# Altium PCB MD5133-A02-01.PcbDoc
Units mil, origin at the board's own origin, x right, y up, seen from the top; angles counter-clockwise.
Board outline 1207.8 x 889 mil, 2 copper layers (TopLayer, BottomLayer); 38 components, 29 nets, 249 pads, 0 vias.
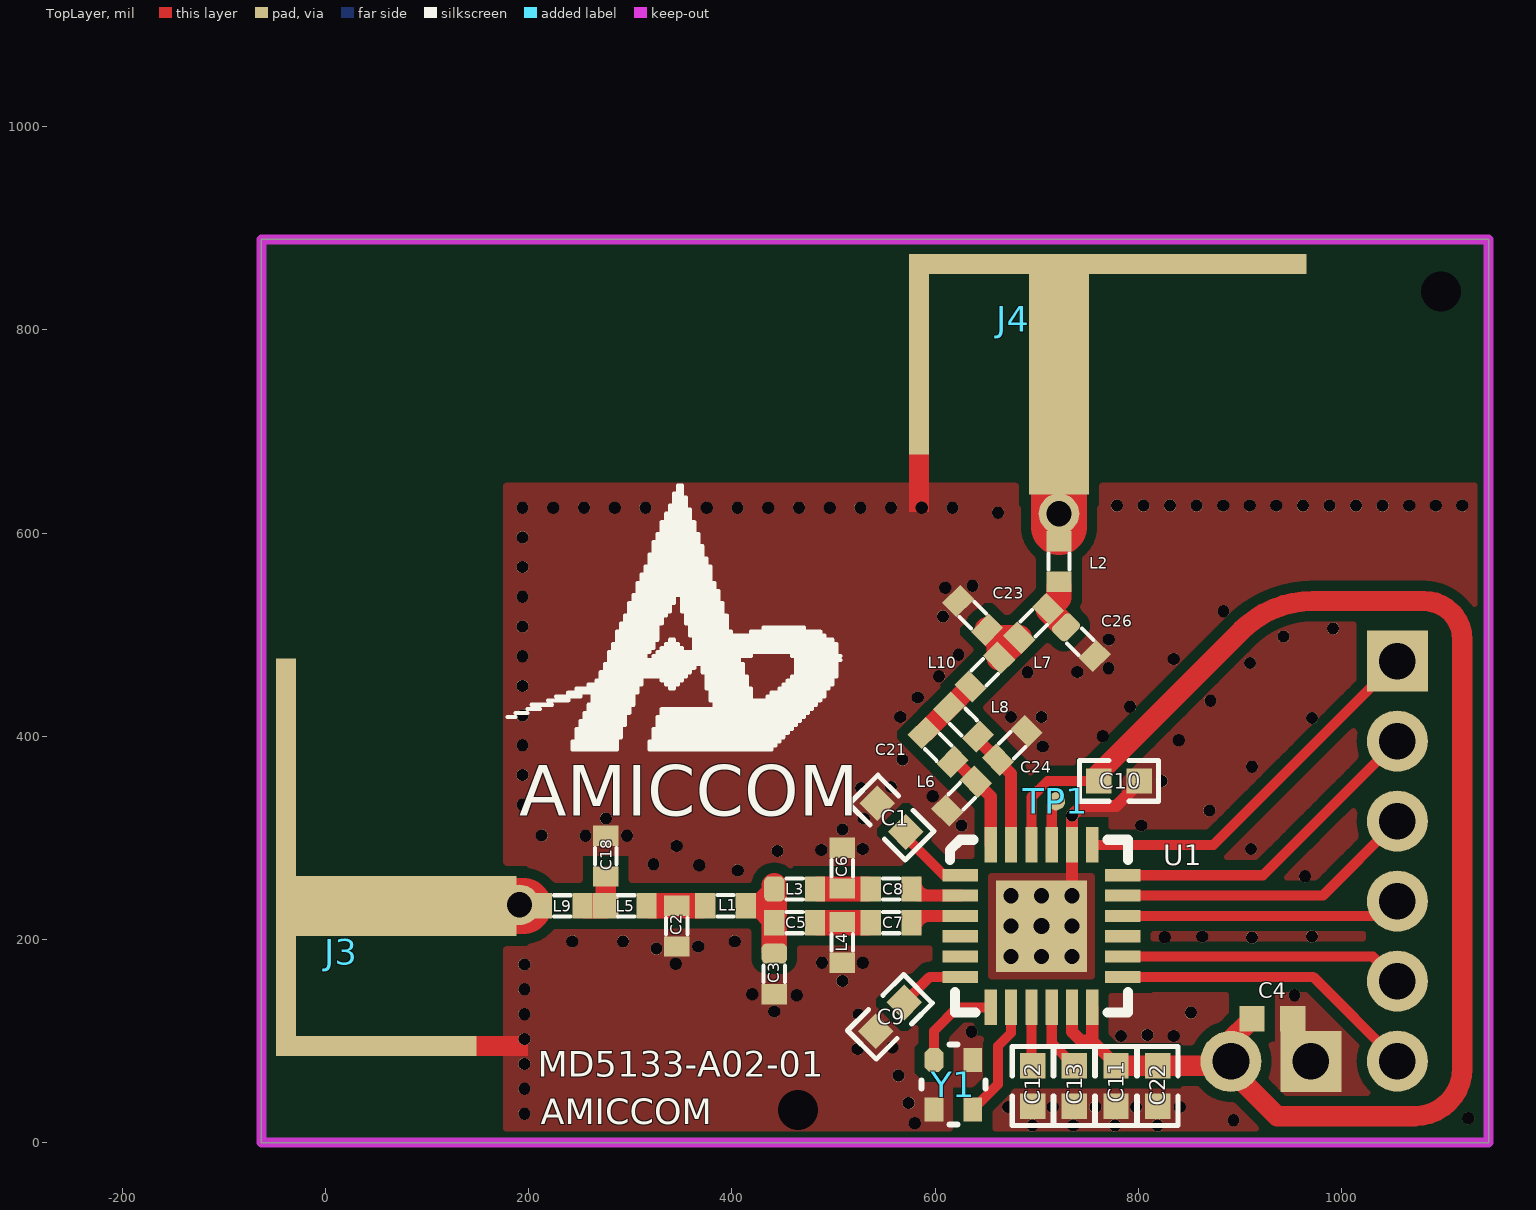
[diagram p0: TopLayer view]
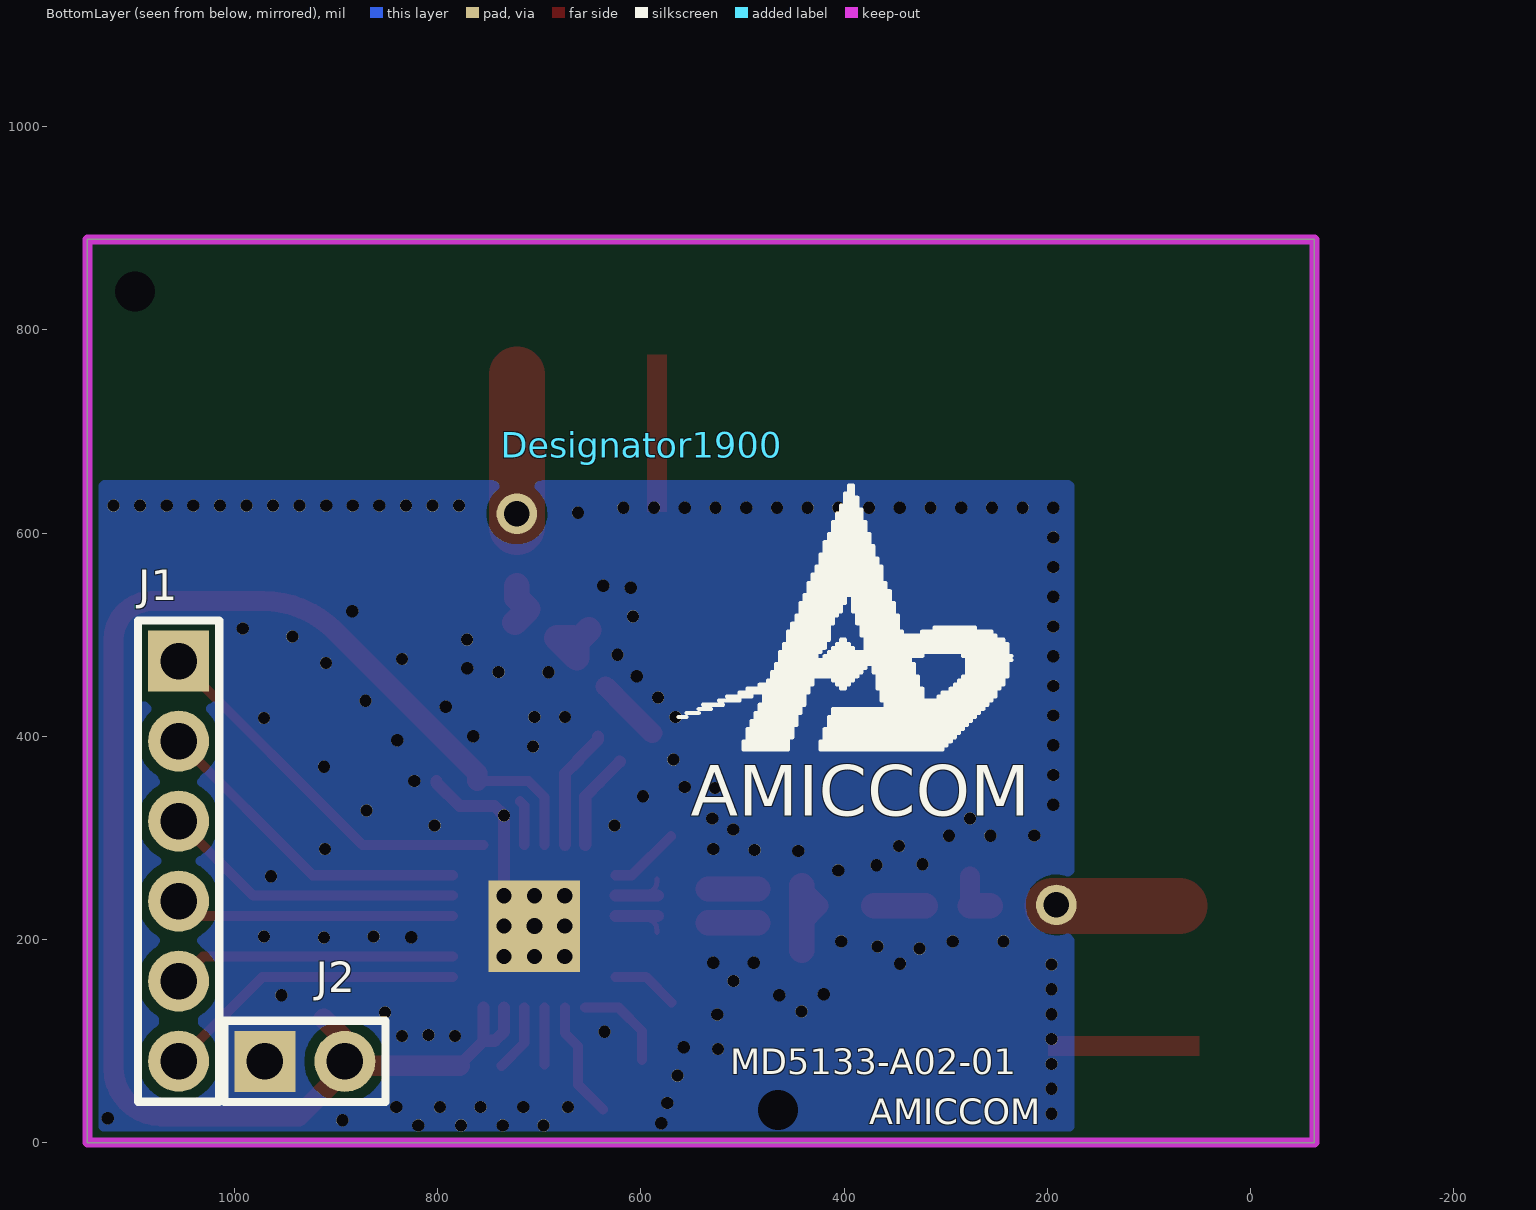
[diagram p1: BottomLayer view, seen from below]

## Layer stack, top to bottom
TopLayer: signal copper 1.4
Dielectric: dielectric 12.6, FR-4, Dk 4.8
BottomLayer: signal copper 1.4

## Board outline
-63,0 -63,889 1144.79,889 1144.79,0

## Design rules (kind name [scope] priority, off if disabled: settings)
Clearance Clearance_1 [(InPoly) vs (IsWire) Or (IsPad) Or (IsVia) Or (IsFill) Or (InPoly)] p1: gap=10
Clearance [All] p2: gap=6
ComponentClearance [All] p1 off: gap=10 collisioncheckmode=3 verticalgap=10 showdistances=FALSE
FabricationTestPointUsage TestPointUsage [All] p1: valid=0 allowmultiple=FALSE
FabricationTestpoint Testpoint [All] p1: side=3 testpointundercomponent=TRUE minsize=40 maxsize=100 preferedsize=60 minholesize=20 maxholesize=40 preferedholesize=32 testpointgrid=1 allowsidetop=TRUE allowsidebottom=TRUE usegrid=TRUE gridtolerance=0.01
HoleSize [All] p1: absolutevalues=TRUE maxlimit=200 minlimit=1 maxpercent=80.000 minpercent=20.000
PolygonConnect [All] p1: connectstyle=Direct reliefconductorwidth=10 reliefentries=4 polygonreliefangle="90 Angle" airgapwidth=10
RoutingVias [All] p1: holewidth=28 width=50 viastyle="Through Hole" minholewidth=28 minwidth=50 maxholewidth=28 maxwidth=50
SilkscreenOverComponentPads [IsPad] p1: minsilkscreentomaskgap=10
SolderMaskExpansion [All] p1: expansion=4
Width [All] p1: maxlimit=100 minlimit=6 preferedwidth=10
23 further rules are at their usual default settings.

## Classes and differential pairs
component class MD5133-A02-01: C1 C2 C3 C4 C5 C6 C7 C8 C9 C10 C11 C12 C13 C18 C21 C22 C23 C24 C26 J1 J2 J3 J4 L1 L2 L3 L4 L5 L6 L7 L8 L9 L10 TP1 U1 Y1

## Components (designator, comment, footprint, x,y, rotation, side; value= is the part's Value field where it differs from the comment)
C1 "0.22uF" 0402 543,334.13 r315 top
C2 "0.2pF" 0402-3#1 345.79,213.13 r270 top
C3 "NC" 0402-3#2 441.79,166.13 r270 top
C4 "2.2uF" 0402 952,122.13 r180 top
C5 "0.5pF" 0402-3#1 461.79,216.63 r180 top
C6 "0.5pF" 0402-3#1 508.79,270.13 r90 top
C7 "5.6pF" 0402-3#1 556.79,216.63 r0 top
C8 "5.6pF" 0402-3#1 556.79,249.63 r0 top
C9 "0.22uF" 0402 569.79,138 r225 top
C10 "0.1uF" 0402 761,356 r0 top
C11 "2.2uF" 0402 778.14,35.73 r90 top
C12 "10nF" 0402 696,35.73 r90 top
C13 "0.22uF" 0402 737.07,35.73 r90 top
C18 "0.1pF" 0402-3#1 276,282 r90 top
C21 "0.4pF" 0402-3#1 603,389 r135 top
C22 "2.2uF" 0402 819.21,35.73 r90 top
C23 "0.1pF" 0402-3#1 637,519 r315 top
C24 "0.4pF" 0402-3#1 676,391 r225 top
C26 "NC" 0402-3#3 743,493 r135 top
Designator1900 "Comment" BMP1 599,687 r180 bottom
J1 "CON/6P 2.0" HDR6_2.0 1055,474 r270 bottom
J2 "CON/2P 2.0" HDR2_2.0 970,80 r180 bottom (schematic designator J4)
J3 "Tx_ANTENNA" ANT3_5.8G-A1011 70,233 r0 top
J4 "Rx_ANTENNA" ANT3_5.8G-A1011 722,756 r270 top (schematic designator J2)
L1 "0R" 0402-3#1 393.79,233.13 r0 top
L2 "0R" 0402-3#1 722,572 r90 top
L3 "1.6nH" 0402-3#2 461.79,249.63 r0 top
L4 "1.6nH" 0402-3#1 508.79,197.13 r270 top
L5 "1nH" 0402-3#4 296,233 r180 top
L6 "0.6nH" 0402-3#1 626.21,341.13 r45 top
L7 "0.6nH" 0402-3#1 697,511.13 r45 top
L8 "0.6nH" 0402-3#1 628,414 r135 top
L9 "0R" 0402-3#1 233,233 r180 top
L10 "0R" 0402-3#1 649,463.13 r45 top
TP1 "TP" "PAD - SMD" 719,336 r90 top
U1 "A5133_U02_Q4P24" "QFN 4*4 24L_A7190" 704.79,213.13 r0 top
Y1 "16MHz, CL=9pF" "XTAL_2.0 *1.6" 618,57 r270 top
? "" BMP1 143,687 r0 top

## Footprints (in the part's own frame and the unit in brackets; to place one, negate y for a bottom-side part, rotate by r counter-clockwise, add the part's x,y. Pads: shape width x height; smd on the part's side, far side on the other; paste and mask are expansions set on the pad)
0402 [mil]
  rect 25x25 smd: 1(0,0) 2(40,0)
  silkscreen extent -19,-20 59,20
0402-3#1 [mil]
  rect 20x25 smd: 1(-20,0) 2(20,0)
  silkscreen extent -8,-11 8,11
0402-3#2 [mil]
  rrect50% 20x25 smd: 1(-20,0)
  rect 20x25 smd: 2(20,0)
  silkscreen extent -8,-11 8,11
0402-3#3 [mil]
  rect 20x25 smd: 1(-20,0)
  rrect50% 20x25 smd: 2(20,0)
  silkscreen extent -8,-10 8,11
0402-3#4 [mil]
  rect 20x25 smd: 1(-20,0)
  rect 25x25 smd: 2(20,0)
  silkscreen extent -8,-11 8,11
ANT3_5.8G-A1011 [mm]
  rect 6x1.5 smd: 1(0,0)
  rect 5x0.5 smd: 2(-0.5,-3.5)
  rect 0.5x9.94 smd: ""(-2.761,1.219)
BMP1 [mil]
  silkscreen extent 36,-300 364,-40
HDR2_2.0 [mil]
  rect 60x60 hole 36: 1(0,0)
  round 60 hole 36: 2(78.74,0)
  silkscreen extent -40,-40 119,40
HDR6_2.0 [mil]
  rect 60x60 hole 36: 1(0,0)
  round 60 hole 36: 2(78.74,0) 3(157.48,0) 4(236.22,0) 5(314.96,0) 6(393.7,0)
  silkscreen extent -40,-40 434,40
"PAD - SMD" [mil]
  round 18 smd: 1(0,0)
"QFN 4*4 24L_A7190" [mil]
  rect 35x12 smd: 1(-80,50) 2(-80,30) 3(-80,10) 4(-80,-10) 5(-80,-30) 6(-80,-50) 13(80,-50) 14(80,-30) 15(80,-10) 16(80,10) 17(80,30) 18(80,50)
  rect 12x35 smd: 7(-50,-80) 8(-30,-80) 9(-10,-80) 10(10,-80) 11(30,-80) 12(50,-80) 19(50,80) 20(30,80) 21(10,80) 22(-10,80) 23(-30,80) 24(-50,80)
  rect 90x90 hole 16: ""(0,0)
  silkscreen extent -90,-85 85,85
"XTAL_2.0 *1.6" [mm]
  oct 0.6x0.47 smd: 1(-0.62,-0.485)
  rect 0.6x0.47 smd: 2(0.62,-0.485) 3(0.62,0.485) 4(-0.62,0.485)
  silkscreen extent -1,-0.8 1,0.8

## Part data
C1 C4 C9 C11 C12 C13 C22: library part CAP
C2 C3 C5 C6 C7 C8 C10 C18 C21 C23 C24 C26: library part C/0603, "Chip C"
J1 J2: "Hole 36mil"
J3 J4: library part ANTENNA
L1 L2 L3 L4 L5 L6 L7 L8 L9 L10: library part L/0603
Y1: library part CRYSTAL/5*3.2, "12.8MHz , 20P"

## Free pads (board coordinates)
  round 12 hole 12: A(194,332.63) A(194,361.87) A(194,391.11) A(194,420.34) A(194,449.58) A(194,478.82) A(194,508.05) A(194,537.29) A(194,566.53) A(194,595.76) A(194,625) A(195.8,28.53) A(195.8,53.01) A(195.8,77.48) A(195.8,101.96) A(195.8,126.43) A(195.8,150.91) A(195.8,175.38) A(212.8,302.23) A(224.23,625) A(243,198.13) A(254.46,625) A(256,302.13) A(276,319.13) A(284.69,625) A(293,198.13) A(296.79,302) A(314.92,625) A(322.79,274) A(325.79,191) A(344.79,176.13) A(345.14,625) A(345.79,292) A(367,193.13) A(368,273.13) A(375.37,625) A(402.79,198.13) A(405.6,625) A(405.79,268) A(420,146.13) A(435.83,625) A(441.79,129.13) A(445,287.13) A(463.79,145.13) A(466.06,625) A(488,288.13) A(488.79,177.13) A(496.29,625) A(508.79,159.13) A(509,308.13) A(524,92.13) A(524.79,126) A(526.52,625) A(527,349.13) A(528.79,177.13) A(528.79,289) A(529.79,319) A(556.75,625) A(556.79,350) A(557.79,94) A(564,66) A(565.79,419) A(568,377) A(574,39) A(580,19.13) A(583,438.13) A(586.97,625) A(597.79,341) A(604,459.13) A(607.79,518) A(610,546.13) A(617.2,625) A(623,480.13) A(626,312.13) A(635.79,109.13) A(637,548.13) A(662,620) A(671.79,35) A(674.79,419) A(691,463) A(695.79,17) A(704.79,419) A(706,390) A(715.79,35) A(734.79,321.93) A(736,17) A(740,463.13) A(757.79,35) A(765,400) A(770.79,467) A(771,495.13) A(777,17) A(778.95,627) A(783,105) A(792,429) A(797.79,35) A(803,312.13) A(805.11,627) A(809,106) A(819,17) A(823,356) A(826,202.13) A(831.26,627) A(835,105) A(835,476) A(839.79,396) A(840.79,35) A(851.79,128) A(857.42,627) A(863,203) A(870,327) A(871,435) A(883.58,627) A(884,523.13) A(893.79,22) A(909.74,627) A(910,472.13) A(911,289) A(912,202) A(912,370) A(935.89,627) A(943,498.13) A(953.79,145.13) A(962.05,627) A(964,262.13) A(971,203) A(971,418) A(988.21,627) A(991.79,506) A(1014.37,627) A(1040.53,627) A(1066.68,627) A(1092.84,627) A(1119,627) A(1124.79,24)
  round 40 hole 25: ""(191,234) ""(722,619)
  round 35 hole 39.37: ""(465,32.13) ""(1098,838)
  round 15 hole 15: ""(674.79,183.13) ""(674.79,213.13) ""(674.79,243.13) ""(704.79,183.13) ""(704.79,243.13) ""(734.79,183.13) ""(734.79,213.13) ""(734.79,243.13)

## Nets (pads, with @x,y where several pads share a name; then routed paths per layer and width w, separated by ;. In a path a pad name is that pad's centre, name@x,y a point inside that pad or via, vN(x,y) a via of type N, cw(c..) or ccw(c..) an arc to the next point about the centre after c; other vN are vias at no path point)
BP_BG: C12.2 U1.9 | length 56.2
  TopLayer w10: C12.2@694.79,76.94 U1.9
CKO: J1.1 U1.19 | length 375.1
  TopLayer w10: U1.19 874.13,293.13 J1.1
GIO1: J1.3 U1.17 | length 300.6
  TopLayer w10: U1.17 981.61,243.13 J1.3
GIO2: J1.2 U1.18 | length 324.9
  TopLayer w10: U1.18 922.87,263.13 J1.2
GND: C1.1 C2.2 C3.2 C4.1 C6.2 C9.2 C10.2 C11.1 C12.1 C13.1 C18.2 C22.1 C23.1 C24.1 C26.1 J2.1 L4.2 L6.1 pad.@465,32.13 pad.@674.79,183.13 pad.@674.79,213.13 pad.@674.79,243.13 pad.@704.79,183.13 pad.@704.79,243.13 pad.@734.79,183.13 pad.@734.79,213.13 pad.@734.79,243.13 pad.A U1. U1.20 Y1.2 Y1.4 | length 160.3
  TopLayer w12: pad.@734.79,243.13 U1.20 734.79,321.93 744.37,331.5 778.47,331.5 801,354.03 C10.2
NetC2_1: C2.1 L1.1 L5.1 | length 51
  TopLayer w25: L5.1@319.79,233.13 L1.1@370.79,233.13
NetC3_1: C3.1 C5.2 L1.2 L3.1 | length 110.7
  TopLayer w20: C5.2 425.29,233.13 L3.1
  TopLayer w25: C3.1@441.79,189.13 C5.2 L3.1@441.79,253.13
NetC5_1: C5.1 C7.1 L4.1 | length 49
  TopLayer w25: C5.1@484.79,216.63 C7.1@533.79,216.63
NetC6_1: C6.1 C8.1 L3.2 | length 49
  TopLayer w25: L3.2@484.79,249.63 C8.1@533.79,249.63
NetC7_2: C7.2 U1.3 | length 64.1
  TopLayer w5: C7.2@584.28,206.92 584.28,209.91 cw(c594.01,209.91) 594.01,219.64 598.29,219.64
  TopLayer w12: C7.2@583.29,223.13 U1.3
NetC8_2: C8.2 U1.2 | length 64.1
  TopLayer w5: C8.2@584.28,259.35 584.28,256.36 ccw(c594.01,256.36) 594.01,246.63 598.29,246.63
  TopLayer w12: C8.2@583.29,243.13 U1.2
NetC18_1: C18.1 L5.2 L9.1 | length 49
  TopLayer w20: L5.2 C18.1
  TopLayer w25: L9.1@256,233 L5.2
NetC21_1: C21.1 L6.2 U1.24 | length 95.8
  TopLayer w12: C21.1@620.76,374.86 L6.2 654.79,340.83 U1.24
NetC21_2: C21.2 L8.2 L10.1 | length 65
  TopLayer w20: C21.2 L8.2 634.71,448.99 L10.1
NetC23_2: C23.2 L7.1 L10.2 | length 76
  TopLayer w25: C23.2 663.14,492.86 L10.2 L7.1 667.28,496.99
NetC24_2: C24.2 L8.1 U1.23 | length 119.7
  TopLayer w12: L8.1 642.14,396.57 C24.2 ; C24.2@661.65,376.21 674.79,363.07 U1.23
NetC26_2: C26.2 L2.1 L7.2 | length 42.9
  TopLayer w25: L7.2@711.14,524.86 C26.2@724,512 ; L7.2@712.93,527.07 722,536.13 L2.1@722,548
NetJ3_1: J3.1 L9.2 pad.@191,234 | length 125
  TopLayer w55: J3.1 pad.@195,233
NetJ4_1: J4.1 L2.2 pad.@722,619 | length 150
  TopLayer w55: pad.@722,606 722,619 J4.1
REGI: C4.2 C10.1 C11.2 C22.2 J2.2 U1.11 U1.12 U1.22 | length 1554.3
  TopLayer w10: U1.22 694.79,340.08 710.72,356 C10.1
  TopLayer w12: U1.11 734.79,109.21 743.77,100.23 754.54,100.23 778.14,76.64 C11.2 ; 754.79,100.49 U1.12
  TopLayer w20: C10.1 761,363.63 901.22,503.84 cw(c971.93,433.13) 971.93,533.13 1081,533.13 cw(c1081,495.13) 1119,495.13 1119,73 cw(c1072.13,73) 1072.13,26.13 936.59,26.13 J2.2@886.99,75.73 ; C11.2 C22.2 J2.2@886.99,75.73 ; C4.2 886.99,97.13 J2.2@886.99,75.73
SCK: J1.5 U1.14 | length 280.2
  TopLayer w10: U1.14 1030.91,183.13 J1.5
SCS: J1.6 U1.13 | length 304.5
  TopLayer w10: U1.13 972.17,163.13 J1.6
SDIO: J1.4 U1.16 | length 276.3
  TopLayer w10: U1.16 1040.35,223.13 J1.4
VDD_D: C13.2 U1.10 | length 66.6
  TopLayer w10: U1.10 714.79,98.01 C13.2
VDD_P: C9.1 U1.6 | length 65.4
  TopLayer w10: C9.1 594.93,163.13 U1.6
VDD_PA: C1.2 U1.1 | length 70.4
  TopLayer w10: C1.2@570.36,301.57 608.79,263.13 U1.1
VDD_R: TP1.1 U1.21 | length 44.6
  TopLayer w10: U1.21 714.79,331.79 TP1.1
XI: U1.8 Y1.3 | length 116.2
  TopLayer w10: Y1.3 662,57.5 662,95.21 674.79,108 U1.8
XO: U1.7 Y1.1 | length 94
  TopLayer w10: Y1.1 598.91,109.91 622.13,133.13 U1.7
pads on no net: J3. J3.2 J4. J4.2 U1.4 U1.5 U1.15

## Polygon pours and split planes (outlines as drawn)
GND on TopLayer "TopLayer-GND" (hatched 90Degree grid 1 track 6, pour order 4): 178,647 1144.79,647 1144.79,0 178,0 178,647
GND on BottomLayer "BottomLayer-GND" (hatched 90Degree grid 3 track 10, pour order 3): 178,647 1144.79,647 1144.79,0 178,0 178,647

## Keep-outs
KeepOutLayer:
  the board outline again, w10

## Other copper
TopLayer:
  region net GND: 574.36,775.69 574.36,620.69 594.05,620.69 594.05,775.69
  rectangle net GND: 50.32,85.36 199.3,105.05
  pour cut-out: 1013.71,514 1100.79,514 1100.79,86 1015,86 1015,136 1014.87,136.13 993,136.13 993,182.21 1021.4,182.21 1021.4,222.79 993,222.79 993,256 1013.71,256
  pour cut-out: 1144.79,56.79 1144.79,0 1101,0 1101,13
  pour cut-out: 624.79,163.13 594.93,163.13 594.93,113.88 598.91,109.91 624.79,135.79

## Silkscreen, mask and mechanical layers (free items; w line width, h text height)
TopOverlay:
  text "MD5133-A02-01" at 208.79,65 h25
  text "AMICCOM" at 211.79,18 h25
BottomOverlay:
  text "MD5133-A02-01" at 512,67.13 h25
  text "AMICCOM" at 375,18.13 h25
TopSolder:
  rectangle: 427.79,184.13 456.79,268.13
  region: 717.5,413.63 740,436.13 720.82,455.31 698.32,432.81
  region: 361.4,287.02 329.58,287.02 329.58,259.9 361.4,259.9
BottomSolder:
  region: 253.21,272.13 253.21,318.13 182.21,318.13 182.21,272.13
  region: 273.21,148.13 273.21,194.13 180.21,194.13 180.21,148.13
  rectangle: 638,548.73 684,639.73
  rectangle: 638,536.73 808,589.73
  rectangle: 762,568.73 808,639.73
  region: 278.65,148 278.65,318 225.65,318 225.65,148
Mechanical1:
  lines w10: 178,-1.13 178,647 1144.78,647
Mechanical2:
  lines w5: 993,136 1015,136 1015,86 1100.79,86 1100.79,514 1015,514 1013.71,514 1013.71,256 993,256 993,222.79 1021.4,222.79 1021.4,182.21 993,182.21 993,136 ; 1101,0 1144.79,0 1144.79,56.79 1101,13 1101,0

## Dimensions
-63,0 to 1144.79,0 on Mechanical1
1144.79,0 to 1144.79,889 on Mechanical1

## Text inside footprints (layer, text, board x,y; h text height)
Designator1900: BottomOverlay "AMICCOM" at 551,322 h50
?: TopOverlay "AMICCOM" at 191,322 h50